# EAGLE board TinyBot_Panel-Panel (EAGLE 9.2.2), part 1 of 4
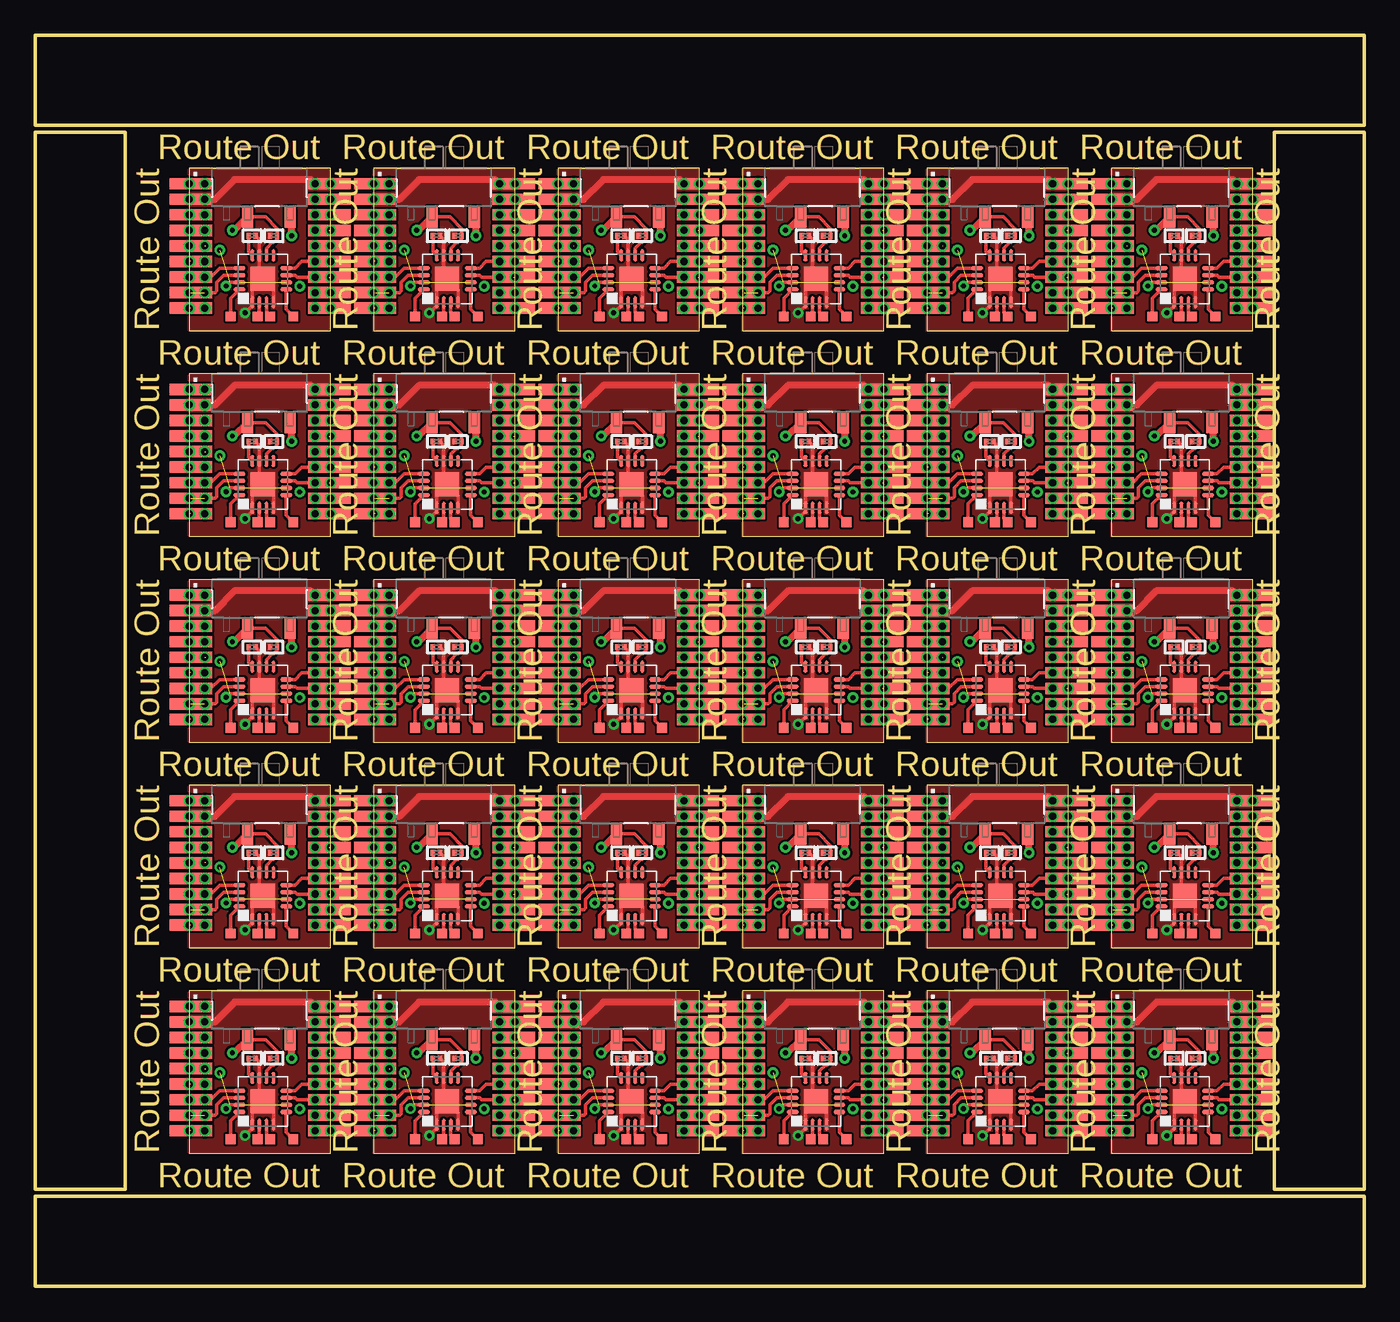
[diagram p0: board, top side]
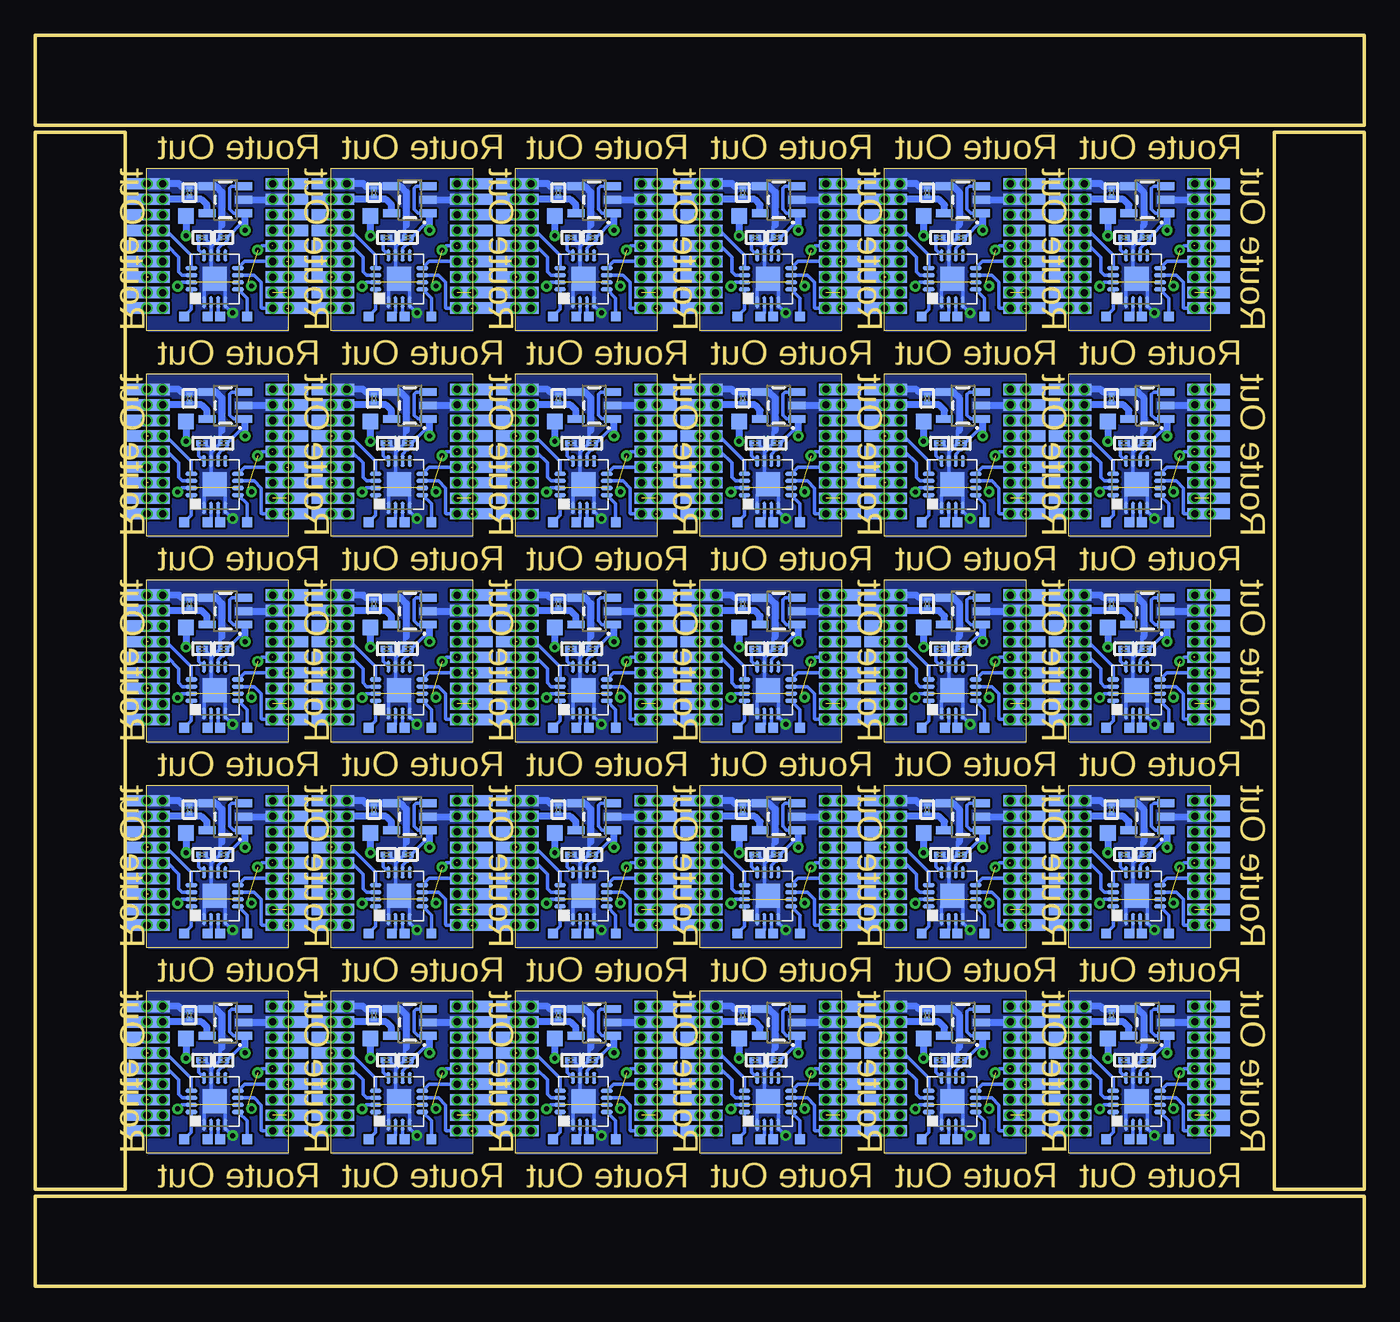
[diagram p1: board, bottom side, seen from below]

Size 94.04 x 88.49 mm. Coordinates in mm from the lower left corner, seen from the top.
Outline: 10.9,9.4 20.9,9.4 20.9,20.9 10.9,20.9 10.9,9.4
Outline: 23.95,9.4 33.95,9.4 33.95,20.9 23.95,20.9 23.95,9.4
Outline: 36.99,9.4 46.99,9.4 46.99,20.9 36.99,20.9 36.99,9.4
Outline: 50.04,9.4 60.04,9.4 60.04,20.9 50.04,20.9 50.04,9.4
Outline: 63.09,9.4 73.09,9.4 73.09,20.9 63.09,20.9 63.09,9.4
Outline: 76.14,9.4 86.14,9.4 86.14,20.9 76.14,20.9 76.14,9.4
Outline: 10.9,23.95 20.9,23.95 20.9,35.45 10.9,35.45 10.9,23.95
Outline: 23.95,23.95 33.95,23.95 33.95,35.45 23.95,35.45 23.95,23.95
Outline: 36.99,23.95 46.99,23.95 46.99,35.45 36.99,35.45 36.99,23.95
Outline: 50.04,23.95 60.04,23.95 60.04,35.45 50.04,35.45 50.04,23.95
Outline: 63.09,23.95 73.09,23.95 73.09,35.45 63.09,35.45 63.09,23.95
Outline: 76.14,23.95 86.14,23.95 86.14,35.45 76.14,35.45 76.14,23.95
Outline: 10.9,38.49 20.9,38.49 20.9,49.99 10.9,49.99 10.9,38.49
Outline: 23.95,38.49 33.95,38.49 33.95,49.99 23.95,49.99 23.95,38.49
Outline: 36.99,38.49 46.99,38.49 46.99,49.99 36.99,49.99 36.99,38.49
Outline: 50.04,38.49 60.04,38.49 60.04,49.99 50.04,49.99 50.04,38.49
Outline: 63.09,38.49 73.09,38.49 73.09,49.99 63.09,49.99 63.09,38.49
Outline: 76.14,38.49 86.14,38.49 86.14,49.99 76.14,49.99 76.14,38.49
Outline: 10.9,53.04 20.9,53.04 20.9,64.54 10.9,64.54 10.9,53.04
Outline: 23.95,53.04 33.95,53.04 33.95,64.54 23.95,64.54 23.95,53.04
Outline: 36.99,53.04 46.99,53.04 46.99,64.54 36.99,64.54 36.99,53.04
Outline: 50.04,53.04 60.04,53.04 60.04,64.54 50.04,64.54 50.04,53.04
Outline: 63.09,53.04 73.09,53.04 73.09,64.54 63.09,64.54 63.09,53.04
Outline: 76.14,53.04 86.14,53.04 86.14,64.54 76.14,64.54 76.14,53.04
Outline: 10.9,67.59 20.9,67.59 20.9,79.09 10.9,79.09 10.9,67.59
Outline: 23.95,67.59 33.95,67.59 33.95,79.09 23.95,79.09 23.95,67.59
Outline: 36.99,67.59 46.99,67.59 46.99,79.09 36.99,79.09 36.99,67.59
Outline: 50.04,67.59 60.04,67.59 60.04,79.09 50.04,79.09 50.04,67.59
Outline: 63.09,67.59 73.09,67.59 73.09,79.09 63.09,79.09 63.09,67.59
Outline: 76.14,67.59 86.14,67.59 86.14,79.09 76.14,79.09 76.14,67.59
Outline: 0,6.35 94.04,6.35 94.04,0 0,0 0,6.35
Outline: 87.69,81.63 94.04,81.63 94.04,6.86 87.69,6.86 87.69,81.63
Outline: 0,88.49 94.04,88.49 94.04,82.14 0,82.14 0,88.49
Outline: 0,81.63 6.35,81.63 6.35,6.86 0,6.86 0,81.63
Copper layers (1*16): Top 0.035mm / dielectric 1.5mm / Bottom 0.035mm
Design rules "default *": minimum track width 6mil, minimum drill 0.35mm, track to track 6mil, track to pad 6mil, pad to pad 6mil, via to via 6mil, smd to smd 6mil, copper to edge 0mil, drill to drill 6mil, minimum pad ring 0mil, minimum via ring 8mil, stop-mask expansion 4mil, vias tented up to drill 0mil, thermal gap 10mil

## Footprints (pad centres in the part's own frame; a part is rotated, then mirrored left to right if it is on the bottom)
C0201 = smd 0.3 x 0.4: 1 -0.254,0; 2 0.254,0
TP11SQ = smd 1.1 x 1.1: TP 0,0
TP07SQ = smd 0.7 x 0.7: TP 0,0
ESP01F = smd 3 x 0.8: 1 0.1,1.1; 2 0.1,2.2; 3 0.1,3.3; 4 0.1,4.4; 5 0.1,5.5; 6 0.1,6.6; 7 0.1,7.7; 8 0.1,8.8; 9 0.1,9.9; 10 9.9,1.1; 11 9.9,2.2; 12 9.9,3.3; 13 9.9,4.4; 14 9.9,5.5; 15 9.9,6.6; 16 9.9,7.7; 17 9.9,8.8; 18 9.9,9.9 | smd 3 x 0.8 bottom: 19 9.9,1.1; 20 9.9,2.2; 21 9.9,3.3; 22 9.9,4.4; 23 9.9,5.5; 24 9.9,6.6; 25 9.9,7.7; 26 9.9,8.8; 27 9.9,9.9; 28 0.1,1.1; 29 0.1,2.2; 30 0.1,3.3; 31 0.1,4.4; 32 0.1,5.5; 33 0.1,6.6; 34 0.1,7.7; 35 0.1,8.8; 36 0.1,9.9 | drill 0.5 pad 0.8: 37 10,1.1; 38 10,2.2; 39 10,3.3; 40 10,4.4; 41 10,5.5; 42 10,6.6; 43 10,7.7; 44 10,8.8; 45 10,9.9; 46 0,1.1; 47 0,2.2; 48 0,3.3; 49 0,4.4; 50 0,5.5; 51 0,6.6; 52 0,7.7; 53 0,8.8; 54 0,9.9; 55 1.1,1.1; 56 1.1,2.2; 57 1.1,3.3; 58 1.1,4.4; 59 1.1,5.5; 60 1.1,6.6; 61 1.1,7.7; 62 1.1,8.8; 63 1.1,9.9; 64 8.9,1.1; 65 8.9,2.2; 66 8.9,3.3; 67 8.9,4.4; 68 8.9,5.5; 69 8.9,6.6; 70 8.9,7.7; 71 8.9,8.8; 72 8.9,9.9
SOT23-5 = smd 0.55 x 1.2: 1 -0.95,-1.3; 2 0,-1.3; 3 0.95,-1.3; 4 0.95,1.3; 5 -0.95,1.3
MSK-12C02_NOCLIP = smd 0.8 x 1.5: COM 0.823,2.1; L2 -2.177,2.1
QFN16 = smd 0.85 x 0.3: 1 -1.655,0.75; 2 -1.655,0.25; 3 -1.655,-0.25; 4 -1.655,-0.75; 9 1.655,-0.75; 10 1.655,-0.25; 11 1.655,0.25; 12 1.655,0.75 | smd 0.3 x 0.85: 5 -0.75,-1.655; 6 -0.25,-1.655; 7 0.25,-1.655; 8 0.75,-1.655; 13 0.75,1.655; 14 0.25,1.655; 15 -0.25,1.655; 16 -0.75,1.655 | smd 1.7 x 1.7: T_PAD 0,0

## Placement (x,y rotation side)
C1  [C0201]  16.87,16.12 180 top
C2  [C0201]  15.47,15.99 180 bottom
C3  [C0201]  16.99,15.99 0 bottom
C4  [C0201]  15.34,16.12 0 top
C5  [C0201]  17.88,19.17 90 bottom
C6  [C0201]  29.92,16.12 180 top
C7  [C0201]  28.39,16.12 0 top
C8  [C0201]  28.52,15.99 180 bottom
C9  [C0201]  30.04,15.99 0 bottom
C10  [C0201]  30.93,19.17 90 bottom
C11  [C0201]  42.96,16.12 180 top
C12  [C0201]  41.44,16.12 0 top
C13  [C0201]  41.57,15.99 180 bottom
C14  [C0201]  43.09,15.99 0 bottom
C15  [C0201]  43.98,19.17 90 bottom
C16  [C0201]  56.01,16.12 180 top
C17  [C0201]  54.49,16.12 0 top
C18  [C0201]  54.61,15.99 180 bottom
C19  [C0201]  56.14,15.99 0 bottom
C20  [C0201]  57.03,19.17 90 bottom
C21  [C0201]  69.06,16.12 180 top
C22  [C0201]  67.53,16.12 0 top
C23  [C0201]  67.66,15.99 180 bottom
C24  [C0201]  69.19,15.99 0 bottom
C25  [C0201]  70.07,19.17 90 bottom
C26  [C0201]  82.11,16.12 180 top
C27  [C0201]  80.58,16.12 0 top
C28  [C0201]  80.71,15.99 180 bottom
C29  [C0201]  82.23,15.99 0 bottom
C30  [C0201]  83.12,19.17 90 bottom
C31  [C0201]  16.87,30.67 180 top
C32  [C0201]  15.34,30.67 0 top
C33  [C0201]  15.47,30.54 180 bottom
C34  [C0201]  16.99,30.54 0 bottom
C35  [C0201]  17.88,33.72 90 bottom
C36  [C0201]  29.92,30.67 180 top
C37  [C0201]  28.39,30.67 0 top
C38  [C0201]  28.52,30.54 180 bottom
C39  [C0201]  30.04,30.54 0 bottom
C40  [C0201]  30.93,33.72 90 bottom
C41  [C0201]  42.96,30.67 180 top
C42  [C0201]  41.44,30.67 0 top
C43  [C0201]  41.57,30.54 180 bottom
C44  [C0201]  43.09,30.54 0 bottom
C45  [C0201]  43.98,33.72 90 bottom
C46  [C0201]  56.01,30.67 180 top
C47  [C0201]  54.49,30.67 0 top
C48  [C0201]  54.61,30.54 180 bottom
C49  [C0201]  56.14,30.54 0 bottom
C50  [C0201]  57.03,33.72 90 bottom
C51  [C0201]  69.06,30.67 180 top
C52  [C0201]  67.53,30.67 0 top
C53  [C0201]  67.66,30.54 180 bottom
C54  [C0201]  69.19,30.54 0 bottom
C55  [C0201]  70.07,33.72 90 bottom
C56  [C0201]  82.11,30.67 180 top
C57  [C0201]  80.58,30.67 0 top
C58  [C0201]  80.71,30.54 180 bottom
C59  [C0201]  82.23,30.54 0 bottom
C60  [C0201]  83.12,33.72 90 bottom
C61  [C0201]  16.87,45.22 180 top
C62  [C0201]  15.34,45.22 0 top
C63  [C0201]  15.47,45.09 180 bottom
C64  [C0201]  16.99,45.09 0 bottom
C65  [C0201]  17.88,48.27 90 bottom
C66  [C0201]  29.92,45.22 180 top
C67  [C0201]  28.39,45.22 0 top
C68  [C0201]  28.52,45.09 180 bottom
C69  [C0201]  30.04,45.09 0 bottom
C70  [C0201]  30.93,48.27 90 bottom
C71  [C0201]  42.96,45.22 180 top
C72  [C0201]  41.44,45.22 0 top
C73  [C0201]  41.57,45.09 180 bottom
C74  [C0201]  43.09,45.09 0 bottom
C75  [C0201]  43.98,48.27 90 bottom
C76  [C0201]  56.01,45.22 180 top
C77  [C0201]  54.49,45.22 0 top
C78  [C0201]  54.61,45.09 180 bottom
C79  [C0201]  56.14,45.09 0 bottom
C80  [C0201]  57.03,48.27 90 bottom
C81  [C0201]  69.06,45.22 180 top
C82  [C0201]  67.53,45.22 0 top
C83  [C0201]  67.66,45.09 180 bottom
C84  [C0201]  69.19,45.09 0 bottom
C85  [C0201]  70.07,48.27 90 bottom
C86  [C0201]  82.11,45.22 180 top
C87  [C0201]  80.58,45.22 0 top
C88  [C0201]  80.71,45.09 180 bottom
C89  [C0201]  82.23,45.09 0 bottom
C90  [C0201]  83.12,48.27 90 bottom
C91  [C0201]  16.87,59.77 180 top
C92  [C0201]  15.34,59.77 0 top
C93  [C0201]  15.47,59.64 180 bottom
C94  [C0201]  16.99,59.64 0 bottom
C95  [C0201]  17.88,62.81 90 bottom
C96  [C0201]  29.92,59.77 180 top
C97  [C0201]  28.39,59.77 0 top
C98  [C0201]  28.52,59.64 180 bottom
C99  [C0201]  30.04,59.64 0 bottom
C100  [C0201]  30.93,62.81 90 bottom
C101  [C0201]  42.96,59.77 180 top
C102  [C0201]  41.44,59.77 0 top
C103  [C0201]  41.57,59.64 180 bottom
C104  [C0201]  43.09,59.64 0 bottom
C105  [C0201]  43.98,62.81 90 bottom
C106  [C0201]  56.01,59.77 180 top
C107  [C0201]  54.49,59.77 0 top
C108  [C0201]  54.61,59.64 180 bottom
C109  [C0201]  56.14,59.64 0 bottom
C110  [C0201]  57.03,62.81 90 bottom
C111  [C0201]  69.06,59.77 180 top
C112  [C0201]  67.53,59.77 0 top
C113  [C0201]  67.66,59.64 180 bottom
C114  [C0201]  69.19,59.64 0 bottom
C115  [C0201]  70.07,62.81 90 bottom
C116  [C0201]  82.11,59.77 180 top
C117  [C0201]  80.58,59.77 0 top
C118  [C0201]  80.71,59.64 180 bottom
C119  [C0201]  82.23,59.64 0 bottom
C120  [C0201]  83.12,62.81 90 bottom
C121  [C0201]  16.87,74.31 180 top
C122  [C0201]  15.34,74.31 0 top
C123  [C0201]  15.47,74.19 180 bottom
C124  [C0201]  16.99,74.19 0 bottom
C125  [C0201]  17.88,77.36 90 bottom
C126  [C0201]  29.92,74.31 180 top
C127  [C0201]  28.39,74.31 0 top
C128  [C0201]  28.52,74.19 180 bottom
C129  [C0201]  30.04,74.19 0 bottom
C130  [C0201]  30.93,77.36 90 bottom
C131  [C0201]  42.96,74.31 180 top
C132  [C0201]  41.44,74.31 0 top
C133  [C0201]  41.57,74.19 180 bottom
C134  [C0201]  43.09,74.19 0 bottom
C135  [C0201]  43.98,77.36 90 bottom
C136  [C0201]  56.01,74.31 180 top
C137  [C0201]  54.49,74.31 0 top
C138  [C0201]  54.61,74.19 180 bottom
C139  [C0201]  56.14,74.19 0 bottom
C140  [C0201]  57.03,77.36 90 bottom
C141  [C0201]  69.06,74.31 180 top
C142  [C0201]  67.53,74.31 0 top
C143  [C0201]  67.66,74.19 180 bottom
C144  [C0201]  69.19,74.19 0 bottom
C145  [C0201]  70.07,77.36 90 bottom
C146  [C0201]  82.11,74.31 180 top
C147  [C0201]  80.58,74.31 0 top
C148  [C0201]  80.71,74.19 180 bottom
C149  [C0201]  82.23,74.19 0 bottom
C150  [C0201]  83.12,77.36 90 bottom
LIPO_IN  TPTP11SQ  [TP11SQ]  18.14,17.52 0 bottom
LIPO_IN1  TPTP11SQ  [TP11SQ]  31.19,17.52 0 bottom
LIPO_IN2  TPTP11SQ  [TP11SQ]  44.23,17.52 0 bottom
LIPO_IN3  TPTP11SQ  [TP11SQ]  57.28,17.52 0 bottom
LIPO_IN4  TPTP11SQ  [TP11SQ]  70.33,17.52 0 bottom
LIPO_IN5  TPTP11SQ  [TP11SQ]  83.38,17.52 0 bottom
LIPO_IN6  TPTP11SQ  [TP11SQ]  18.14,32.07 0 bottom
LIPO_IN7  TPTP11SQ  [TP11SQ]  31.19,32.07 0 bottom
LIPO_IN8  TPTP11SQ  [TP11SQ]  44.23,32.07 0 bottom
LIPO_IN9  TPTP11SQ  [TP11SQ]  57.28,32.07 0 bottom
LIPO_IN10  TPTP11SQ  [TP11SQ]  70.33,32.07 0 bottom
LIPO_IN11  TPTP11SQ  [TP11SQ]  83.38,32.07 0 bottom
LIPO_IN12  TPTP11SQ  [TP11SQ]  18.14,46.61 0 bottom
LIPO_IN13  TPTP11SQ  [TP11SQ]  31.19,46.61 0 bottom
LIPO_IN14  TPTP11SQ  [TP11SQ]  44.23,46.61 0 bottom
LIPO_IN15  TPTP11SQ  [TP11SQ]  57.28,46.61 0 bottom
LIPO_IN16  TPTP11SQ  [TP11SQ]  70.33,46.61 0 bottom
LIPO_IN17  TPTP11SQ  [TP11SQ]  83.38,46.61 0 bottom
LIPO_IN18  TPTP11SQ  [TP11SQ]  18.14,61.16 0 bottom
LIPO_IN19  TPTP11SQ  [TP11SQ]  31.19,61.16 0 bottom
LIPO_IN20  TPTP11SQ  [TP11SQ]  44.23,61.16 0 bottom
LIPO_IN21  TPTP11SQ  [TP11SQ]  57.28,61.16 0 bottom
LIPO_IN22  TPTP11SQ  [TP11SQ]  70.33,61.16 0 bottom
LIPO_IN23  TPTP11SQ  [TP11SQ]  83.38,61.16 0 bottom
LIPO_IN24  TPTP11SQ  [TP11SQ]  18.14,75.71 0 bottom
LIPO_IN25  TPTP11SQ  [TP11SQ]  31.19,75.71 0 bottom
LIPO_IN26  TPTP11SQ  [TP11SQ]  44.23,75.71 0 bottom
LIPO_IN27  TPTP11SQ  [TP11SQ]  57.28,75.71 0 bottom
LIPO_IN28  TPTP11SQ  [TP11SQ]  70.33,75.71 0 bottom
LIPO_IN29  TPTP11SQ  [TP11SQ]  83.38,75.71 0 bottom
TP1  TPTP07SQ  [TP07SQ]  13.82,10.41 0 top
TP2  TPTP07SQ  [TP07SQ]  15.72,10.41 0 top
TP3  TPTP07SQ  [TP07SQ]  18.26,10.41 0 top
TP4  TPTP07SQ  [TP07SQ]  16.61,10.41 0 top
TP5  TPTP07SQ  [TP07SQ]  18.26,10.41 0 bottom
TP6  TPTP07SQ  [TP07SQ]  16.61,10.41 0 bottom
TP7  TPTP07SQ  [TP07SQ]  13.82,10.41 0 bottom
TP8  TPTP07SQ  [TP07SQ]  15.72,10.41 0 bottom
TP9  TPTP07SQ  [TP07SQ]  28.77,10.41 0 top
TP10  TPTP07SQ  [TP07SQ]  26.87,10.41 0 top
TP11  TPTP07SQ  [TP07SQ]  31.31,10.41 0 top
TP12  TPTP07SQ  [TP07SQ]  29.66,10.41 0 top
TP13  TPTP07SQ  [TP07SQ]  31.31,10.41 0 bottom
TP14  TPTP07SQ  [TP07SQ]  29.66,10.41 0 bottom
TP15  TPTP07SQ  [TP07SQ]  26.87,10.41 0 bottom
TP16  TPTP07SQ  [TP07SQ]  28.77,10.41 0 bottom
TP17  TPTP07SQ  [TP07SQ]  41.82,10.41 0 top
TP18  TPTP07SQ  [TP07SQ]  39.92,10.41 0 top
TP19  TPTP07SQ  [TP07SQ]  44.36,10.41 0 top
TP20  TPTP07SQ  [TP07SQ]  42.71,10.41 0 top
TP21  TPTP07SQ  [TP07SQ]  44.36,10.41 0 bottom
TP22  TPTP07SQ  [TP07SQ]  42.71,10.41 0 bottom
TP23  TPTP07SQ  [TP07SQ]  39.92,10.41 0 bottom
TP24  TPTP07SQ  [TP07SQ]  41.82,10.41 0 bottom
TP25  TPTP07SQ  [TP07SQ]  54.87,10.41 0 top
TP26  TPTP07SQ  [TP07SQ]  52.96,10.41 0 top
TP27  TPTP07SQ  [TP07SQ]  57.41,10.41 0 top
TP28  TPTP07SQ  [TP07SQ]  55.76,10.41 0 top
TP29  TPTP07SQ  [TP07SQ]  57.41,10.41 0 bottom
TP30  TPTP07SQ  [TP07SQ]  55.76,10.41 0 bottom
TP31  TPTP07SQ  [TP07SQ]  52.96,10.41 0 bottom
TP32  TPTP07SQ  [TP07SQ]  54.87,10.41 0 bottom
TP33  TPTP07SQ  [TP07SQ]  67.92,10.41 0 top
TP34  TPTP07SQ  [TP07SQ]  66.01,10.41 0 top
TP35  TPTP07SQ  [TP07SQ]  70.46,10.41 0 top
TP36  TPTP07SQ  [TP07SQ]  68.8,10.41 0 top
TP37  TPTP07SQ  [TP07SQ]  70.46,10.41 0 bottom
TP38  TPTP07SQ  [TP07SQ]  68.8,10.41 0 bottom
TP39  TPTP07SQ  [TP07SQ]  66.01,10.41 0 bottom
TP40  TPTP07SQ  [TP07SQ]  67.92,10.41 0 bottom
TP41  TPTP07SQ  [TP07SQ]  80.96,10.41 0 top
TP42  TPTP07SQ  [TP07SQ]  79.06,10.41 0 top
TP43  TPTP07SQ  [TP07SQ]  83.5,10.41 0 top
TP44  TPTP07SQ  [TP07SQ]  81.85,10.41 0 top
TP45  TPTP07SQ  [TP07SQ]  83.5,10.41 0 bottom
TP46  TPTP07SQ  [TP07SQ]  81.85,10.41 0 bottom
TP47  TPTP07SQ  [TP07SQ]  79.06,10.41 0 bottom
TP48  TPTP07SQ  [TP07SQ]  80.96,10.41 0 bottom
TP49  TPTP07SQ  [TP07SQ]  15.72,24.95 0 top
TP50  TPTP07SQ  [TP07SQ]  13.82,24.95 0 top
TP51  TPTP07SQ  [TP07SQ]  18.26,24.95 0 top
TP52  TPTP07SQ  [TP07SQ]  16.61,24.95 0 top
TP53  TPTP07SQ  [TP07SQ]  18.26,24.95 0 bottom
TP54  TPTP07SQ  [TP07SQ]  16.61,24.95 0 bottom
TP55  TPTP07SQ  [TP07SQ]  13.82,24.95 0 bottom
TP56  TPTP07SQ  [TP07SQ]  15.72,24.95 0 bottom
TP57  TPTP07SQ  [TP07SQ]  28.77,24.95 0 top
TP58  TPTP07SQ  [TP07SQ]  26.87,24.95 0 top
TP59  TPTP07SQ  [TP07SQ]  31.31,24.95 0 top
TP60  TPTP07SQ  [TP07SQ]  29.66,24.95 0 top
TP61  TPTP07SQ  [TP07SQ]  31.31,24.95 0 bottom
TP62  TPTP07SQ  [TP07SQ]  29.66,24.95 0 bottom
TP63  TPTP07SQ  [TP07SQ]  26.87,24.95 0 bottom
TP64  TPTP07SQ  [TP07SQ]  28.77,24.95 0 bottom
TP65  TPTP07SQ  [TP07SQ]  41.82,24.95 0 top
TP66  TPTP07SQ  [TP07SQ]  39.92,24.95 0 top
TP67  TPTP07SQ  [TP07SQ]  44.36,24.95 0 top
TP68  TPTP07SQ  [TP07SQ]  42.71,24.95 0 top
TP69  TPTP07SQ  [TP07SQ]  44.36,24.95 0 bottom
TP70  TPTP07SQ  [TP07SQ]  42.71,24.95 0 bottom
TP71  TPTP07SQ  [TP07SQ]  39.92,24.95 0 bottom
TP72  TPTP07SQ  [TP07SQ]  41.82,24.95 0 bottom
TP73  TPTP07SQ  [TP07SQ]  54.87,24.95 0 top
TP74  TPTP07SQ  [TP07SQ]  52.96,24.95 0 top
TP75  TPTP07SQ  [TP07SQ]  57.41,24.95 0 top
TP76  TPTP07SQ  [TP07SQ]  55.76,24.95 0 top
TP77  TPTP07SQ  [TP07SQ]  57.41,24.95 0 bottom
TP78  TPTP07SQ  [TP07SQ]  55.76,24.95 0 bottom
TP79  TPTP07SQ  [TP07SQ]  52.96,24.95 0 bottom
TP80  TPTP07SQ  [TP07SQ]  54.87,24.95 0 bottom
TP81  TPTP07SQ  [TP07SQ]  67.92,24.95 0 top
TP82  TPTP07SQ  [TP07SQ]  66.01,24.95 0 top
TP83  TPTP07SQ  [TP07SQ]  70.46,24.95 0 top
TP84  TPTP07SQ  [TP07SQ]  68.8,24.95 0 top
TP85  TPTP07SQ  [TP07SQ]  70.46,24.95 0 bottom
TP86  TPTP07SQ  [TP07SQ]  68.8,24.95 0 bottom
TP87  TPTP07SQ  [TP07SQ]  66.01,24.95 0 bottom
TP88  TPTP07SQ  [TP07SQ]  67.92,24.95 0 bottom
TP89  TPTP07SQ  [TP07SQ]  80.96,24.95 0 top
TP90  TPTP07SQ  [TP07SQ]  79.06,24.95 0 top
TP91  TPTP07SQ  [TP07SQ]  83.5,24.95 0 top
TP92  TPTP07SQ  [TP07SQ]  81.85,24.95 0 top
TP93  TPTP07SQ  [TP07SQ]  83.5,24.95 0 bottom
TP94  TPTP07SQ  [TP07SQ]  81.85,24.95 0 bottom
TP95  TPTP07SQ  [TP07SQ]  79.06,24.95 0 bottom
TP96  TPTP07SQ  [TP07SQ]  80.96,24.95 0 bottom
TP97  TPTP07SQ  [TP07SQ]  15.72,39.5 0 top
TP98  TPTP07SQ  [TP07SQ]  13.82,39.5 0 top
TP99  TPTP07SQ  [TP07SQ]  18.26,39.5 0 top
TP100  TPTP07SQ  [TP07SQ]  16.61,39.5 0 top
TP101  TPTP07SQ  [TP07SQ]  18.26,39.5 0 bottom
TP102  TPTP07SQ  [TP07SQ]  16.61,39.5 0 bottom
TP103  TPTP07SQ  [TP07SQ]  13.82,39.5 0 bottom
TP104  TPTP07SQ  [TP07SQ]  15.72,39.5 0 bottom
TP105  TPTP07SQ  [TP07SQ]  28.77,39.5 0 top
TP106  TPTP07SQ  [TP07SQ]  26.87,39.5 0 top
TP107  TPTP07SQ  [TP07SQ]  31.31,39.5 0 top
TP108  TPTP07SQ  [TP07SQ]  29.66,39.5 0 top
TP109  TPTP07SQ  [TP07SQ]  31.31,39.5 0 bottom
TP110  TPTP07SQ  [TP07SQ]  29.66,39.5 0 bottom
TP111  TPTP07SQ  [TP07SQ]  26.87,39.5 0 bottom
TP112  TPTP07SQ  [TP07SQ]  28.77,39.5 0 bottom
TP113  TPTP07SQ  [TP07SQ]  41.82,39.5 0 top
TP114  TPTP07SQ  [TP07SQ]  39.92,39.5 0 top
TP115  TPTP07SQ  [TP07SQ]  44.36,39.5 0 top
TP116  TPTP07SQ  [TP07SQ]  42.71,39.5 0 top
TP117  TPTP07SQ  [TP07SQ]  44.36,39.5 0 bottom
TP118  TPTP07SQ  [TP07SQ]  42.71,39.5 0 bottom
TP119  TPTP07SQ  [TP07SQ]  39.92,39.5 0 bottom
TP120  TPTP07SQ  [TP07SQ]  41.82,39.5 0 bottom
TP121  TPTP07SQ  [TP07SQ]  54.87,39.5 0 top
TP122  TPTP07SQ  [TP07SQ]  52.96,39.5 0 top
TP123  TPTP07SQ  [TP07SQ]  57.41,39.5 0 top
TP124  TPTP07SQ  [TP07SQ]  55.76,39.5 0 top
TP125  TPTP07SQ  [TP07SQ]  57.41,39.5 0 bottom
TP126  TPTP07SQ  [TP07SQ]  55.76,39.5 0 bottom
TP127  TPTP07SQ  [TP07SQ]  52.96,39.5 0 bottom
TP128  TPTP07SQ  [TP07SQ]  54.87,39.5 0 bottom
TP129  TPTP07SQ  [TP07SQ]  67.92,39.5 0 top
TP130  TPTP07SQ  [TP07SQ]  66.01,39.5 0 top
TP131  TPTP07SQ  [TP07SQ]  70.46,39.5 0 top
TP132  TPTP07SQ  [TP07SQ]  68.8,39.5 0 top
TP133  TPTP07SQ  [TP07SQ]  70.46,39.5 0 bottom
TP134  TPTP07SQ  [TP07SQ]  68.8,39.5 0 bottom
TP135  TPTP07SQ  [TP07SQ]  66.01,39.5 0 bottom
TP136  TPTP07SQ  [TP07SQ]  67.92,39.5 0 bottom
TP137  TPTP07SQ  [TP07SQ]  80.96,39.5 0 top
TP138  TPTP07SQ  [TP07SQ]  79.06,39.5 0 top
TP139  TPTP07SQ  [TP07SQ]  83.5,39.5 0 top
TP140  TPTP07SQ  [TP07SQ]  81.85,39.5 0 top
TP141  TPTP07SQ  [TP07SQ]  83.5,39.5 0 bottom
TP142  TPTP07SQ  [TP07SQ]  81.85,39.5 0 bottom
TP143  TPTP07SQ  [TP07SQ]  79.06,39.5 0 bottom
TP144  TPTP07SQ  [TP07SQ]  80.96,39.5 0 bottom
TP145  TPTP07SQ  [TP07SQ]  15.72,54.05 0 top
TP146  TPTP07SQ  [TP07SQ]  13.82,54.05 0 top
TP147  TPTP07SQ  [TP07SQ]  18.26,54.05 0 top
TP148  TPTP07SQ  [TP07SQ]  16.61,54.05 0 top
TP149  TPTP07SQ  [TP07SQ]  18.26,54.05 0 bottom
TP150  TPTP07SQ  [TP07SQ]  16.61,54.05 0 bottom
TP151  TPTP07SQ  [TP07SQ]  13.82,54.05 0 bottom
TP152  TPTP07SQ  [TP07SQ]  15.72,54.05 0 bottom
TP153  TPTP07SQ  [TP07SQ]  28.77,54.05 0 top
TP154  TPTP07SQ  [TP07SQ]  26.87,54.05 0 top
TP155  TPTP07SQ  [TP07SQ]  31.31,54.05 0 top
TP156  TPTP07SQ  [TP07SQ]  29.66,54.05 0 top
TP157  TPTP07SQ  [TP07SQ]  31.31,54.05 0 bottom
TP158  TPTP07SQ  [TP07SQ]  29.66,54.05 0 bottom
TP159  TPTP07SQ  [TP07SQ]  26.87,54.05 0 bottom
TP160  TPTP07SQ  [TP07SQ]  28.77,54.05 0 bottom
TP161  TPTP07SQ  [TP07SQ]  41.82,54.05 0 top
TP162  TPTP07SQ  [TP07SQ]  39.92,54.05 0 top
TP163  TPTP07SQ  [TP07SQ]  44.36,54.05 0 top
TP164  TPTP07SQ  [TP07SQ]  42.71,54.05 0 top
TP165  TPTP07SQ  [TP07SQ]  44.36,54.05 0 bottom
TP166  TPTP07SQ  [TP07SQ]  42.71,54.05 0 bottom
TP167  TPTP07SQ  [TP07SQ]  39.92,54.05 0 bottom
TP168  TPTP07SQ  [TP07SQ]  41.82,54.05 0 bottom
TP169  TPTP07SQ  [TP07SQ]  54.87,54.05 0 top
TP170  TPTP07SQ  [TP07SQ]  52.96,54.05 0 top
TP171  TPTP07SQ  [TP07SQ]  57.41,54.05 0 top
TP172  TPTP07SQ  [TP07SQ]  55.76,54.05 0 top
TP173  TPTP07SQ  [TP07SQ]  57.41,54.05 0 bottom
TP174  TPTP07SQ  [TP07SQ]  55.76,54.05 0 bottom
TP175  TPTP07SQ  [TP07SQ]  52.96,54.05 0 bottom
TP176  TPTP07SQ  [TP07SQ]  54.87,54.05 0 bottom
TP177  TPTP07SQ  [TP07SQ]  67.92,54.05 0 top
TP178  TPTP07SQ  [TP07SQ]  66.01,54.05 0 top
TP179  TPTP07SQ  [TP07SQ]  70.46,54.05 0 top
TP180  TPTP07SQ  [TP07SQ]  68.8,54.05 0 top
TP181  TPTP07SQ  [TP07SQ]  70.46,54.05 0 bottom
TP182  TPTP07SQ  [TP07SQ]  68.8,54.05 0 bottom
TP183  TPTP07SQ  [TP07SQ]  66.01,54.05 0 bottom
TP184  TPTP07SQ  [TP07SQ]  67.92,54.05 0 bottom
TP185  TPTP07SQ  [TP07SQ]  80.96,54.05 0 top
TP186  TPTP07SQ  [TP07SQ]  79.06,54.05 0 top
TP187  TPTP07SQ  [TP07SQ]  83.5,54.05 0 top
TP188  TPTP07SQ  [TP07SQ]  81.85,54.05 0 top
TP189  TPTP07SQ  [TP07SQ]  83.5,54.05 0 bottom
TP190  TPTP07SQ  [TP07SQ]  81.85,54.05 0 bottom
TP191  TPTP07SQ  [TP07SQ]  79.06,54.05 0 bottom
TP192  TPTP07SQ  [TP07SQ]  80.96,54.05 0 bottom
TP193  TPTP07SQ  [TP07SQ]  15.72,68.6 0 top
TP194  TPTP07SQ  [TP07SQ]  13.82,68.6 0 top
TP195  TPTP07SQ  [TP07SQ]  18.26,68.6 0 top
TP196  TPTP07SQ  [TP07SQ]  16.61,68.6 0 top
TP197  TPTP07SQ  [TP07SQ]  18.26,68.6 0 bottom
TP198  TPTP07SQ  [TP07SQ]  16.61,68.6 0 bottom
TP199  TPTP07SQ  [TP07SQ]  13.82,68.6 0 bottom
TP200  TPTP07SQ  [TP07SQ]  15.72,68.6 0 bottom
TP201  TPTP07SQ  [TP07SQ]  28.77,68.6 0 top
TP202  TPTP07SQ  [TP07SQ]  26.87,68.6 0 top
TP203  TPTP07SQ  [TP07SQ]  31.31,68.6 0 top
TP204  TPTP07SQ  [TP07SQ]  29.66,68.6 0 top
TP205  TPTP07SQ  [TP07SQ]  31.31,68.6 0 bottom
TP206  TPTP07SQ  [TP07SQ]  29.66,68.6 0 bottom
TP207  TPTP07SQ  [TP07SQ]  26.87,68.6 0 bottom
TP208  TPTP07SQ  [TP07SQ]  28.77,68.6 0 bottom
TP209  TPTP07SQ  [TP07SQ]  41.82,68.6 0 top
TP210  TPTP07SQ  [TP07SQ]  39.92,68.6 0 top
TP211  TPTP07SQ  [TP07SQ]  44.36,68.6 0 top
TP212  TPTP07SQ  [TP07SQ]  42.71,68.6 0 top
TP213  TPTP07SQ  [TP07SQ]  44.36,68.6 0 bottom
TP214  TPTP07SQ  [TP07SQ]  42.71,68.6 0 bottom
TP215  TPTP07SQ  [TP07SQ]  39.92,68.6 0 bottom
TP216  TPTP07SQ  [TP07SQ]  41.82,68.6 0 bottom
TP217  TPTP07SQ  [TP07SQ]  54.87,68.6 0 top
TP218  TPTP07SQ  [TP07SQ]  52.96,68.6 0 top
TP219  TPTP07SQ  [TP07SQ]  57.41,68.6 0 top
TP220  TPTP07SQ  [TP07SQ]  55.76,68.6 0 top
TP221  TPTP07SQ  [TP07SQ]  57.41,68.6 0 bottom
TP222  TPTP07SQ  [TP07SQ]  55.76,68.6 0 bottom
TP223  TPTP07SQ  [TP07SQ]  52.96,68.6 0 bottom
TP224  TPTP07SQ  [TP07SQ]  54.87,68.6 0 bottom
TP225  TPTP07SQ  [TP07SQ]  67.92,68.6 0 top
TP226  TPTP07SQ  [TP07SQ]  66.01,68.6 0 top
TP227  TPTP07SQ  [TP07SQ]  70.46,68.6 0 top
TP228  TPTP07SQ  [TP07SQ]  68.8,68.6 0 top
TP229  TPTP07SQ  [TP07SQ]  70.46,68.6 0 bottom
TP230  TPTP07SQ  [TP07SQ]  68.8,68.6 0 bottom
TP231  TPTP07SQ  [TP07SQ]  66.01,68.6 0 bottom
TP232  TPTP07SQ  [TP07SQ]  67.92,68.6 0 bottom
TP233  TPTP07SQ  [TP07SQ]  80.96,68.6 0 top
TP234  TPTP07SQ  [TP07SQ]  79.06,68.6 0 top
TP235  TPTP07SQ  [TP07SQ]  83.5,68.6 0 top
TP236  TPTP07SQ  [TP07SQ]  81.85,68.6 0 top
TP237  TPTP07SQ  [TP07SQ]  83.5,68.6 0 bottom
TP238  TPTP07SQ  [TP07SQ]  81.85,68.6 0 bottom
TP239  TPTP07SQ  [TP07SQ]  79.06,68.6 0 bottom
TP240  TPTP07SQ  [TP07SQ]  80.96,68.6 0 bottom
U$1  ESP01F  [ESP01F]  10.9,9.9 0 top
U$2  ESP01F  [ESP01F]  23.95,9.9 0 top
U$3  TLV755P  [SOT23-5]  28.39,18.66 90 bottom
U$4  MSK-12C02_SMD_SPDT_SWITCH_NOCLIP  [MSK-12C02_NOCLIP]  15.85,19.55 180 top
U$5  TLV755P  [SOT23-5]  15.34,18.66 90 bottom
U$6  DRV8833C  [QFN16]  29.15,13.07 90 top
U$7  DRV8833C  [QFN16]  29.15,13.07 90 bottom
U$8  MSK-12C02_SMD_SPDT_SWITCH_NOCLIP  [MSK-12C02_NOCLIP]  28.9,19.55 180 top
U$9  ESP01F  [ESP01F]  36.99,9.9 0 top
U$10  TLV755P  [SOT23-5]  41.44,18.66 90 bottom
U$11  DRV8833C  [QFN16]  16.1,13.07 90 top
U$12  DRV8833C  [QFN16]  42.2,13.07 90 top
U$13  DRV8833C  [QFN16]  42.2,13.07 90 bottom
U$14  MSK-12C02_SMD_SPDT_SWITCH_NOCLIP  [MSK-12C02_NOCLIP]  41.95,19.55 180 top
U$15  ESP01F  [ESP01F]  50.04,9.9 0 top
U$16  DRV8833C  [QFN16]  16.1,13.07 90 bottom
U$17  TLV755P  [SOT23-5]  54.49,18.66 90 bottom
U$18  DRV8833C  [QFN16]  55.25,13.07 90 top
U$19  DRV8833C  [QFN16]  55.25,13.07 90 bottom
U$20  MSK-12C02_SMD_SPDT_SWITCH_NOCLIP  [MSK-12C02_NOCLIP]  54.99,19.55 180 top
U$21  ESP01F  [ESP01F]  63.09,9.9 0 top
U$22  TLV755P  [SOT23-5]  67.53,18.66 90 bottom
U$23  DRV8833C  [QFN16]  68.3,13.07 90 top
U$24  DRV8833C  [QFN16]  68.3,13.07 90 bottom
U$25  MSK-12C02_SMD_SPDT_SWITCH_NOCLIP  [MSK-12C02_NOCLIP]  68.04,19.55 180 top
U$26  ESP01F  [ESP01F]  76.14,9.9 0 top
U$27  TLV755P  [SOT23-5]  80.58,18.66 90 bottom
U$28  DRV8833C  [QFN16]  81.34,13.07 90 top
U$29  DRV8833C  [QFN16]  81.34,13.07 90 bottom
U$30  MSK-12C02_SMD_SPDT_SWITCH_NOCLIP  [MSK-12C02_NOCLIP]  81.09,19.55 180 top
U$31  ESP01F  [ESP01F]  10.9,24.45 0 top
U$32  TLV755P  [SOT23-5]  15.34,33.21 90 bottom
U$33  DRV8833C  [QFN16]  16.1,27.62 90 top
U$34  DRV8833C  [QFN16]  16.1,27.62 90 bottom
U$35  MSK-12C02_SMD_SPDT_SWITCH_NOCLIP  [MSK-12C02_NOCLIP]  15.85,34.1 180 top
U$36  ESP01F  [ESP01F]  23.95,24.45 0 top
U$37  TLV755P  [SOT23-5]  28.39,33.21 90 bottom
U$38  DRV8833C  [QFN16]  29.15,27.62 90 top
U$39  DRV8833C  [QFN16]  29.15,27.62 90 bottom
U$40  MSK-12C02_SMD_SPDT_SWITCH_NOCLIP  [MSK-12C02_NOCLIP]  28.9,34.1 180 top
U$41  ESP01F  [ESP01F]  36.99,24.45 0 top
U$42  TLV755P  [SOT23-5]  41.44,33.21 90 bottom
U$43  DRV8833C  [QFN16]  42.2,27.62 90 top
U$44  DRV8833C  [QFN16]  42.2,27.62 90 bottom
U$45  MSK-12C02_SMD_SPDT_SWITCH_NOCLIP  [MSK-12C02_NOCLIP]  41.95,34.1 180 top
U$46  ESP01F  [ESP01F]  50.04,24.45 0 top
U$47  TLV755P  [SOT23-5]  54.49,33.21 90 bottom
U$48  DRV8833C  [QFN16]  55.25,27.62 90 top
U$49  DRV8833C  [QFN16]  55.25,27.62 90 bottom
U$50  MSK-12C02_SMD_SPDT_SWITCH_NOCLIP  [MSK-12C02_NOCLIP]  54.99,34.1 180 top
U$51  ESP01F  [ESP01F]  63.09,24.45 0 top
U$52  TLV755P  [SOT23-5]  67.53,33.21 90 bottom
U$53  DRV8833C  [QFN16]  68.3,27.62 90 top
U$54  DRV8833C  [QFN16]  68.3,27.62 90 bottom
U$55  MSK-12C02_SMD_SPDT_SWITCH_NOCLIP  [MSK-12C02_NOCLIP]  68.04,34.1 180 top
U$56  ESP01F  [ESP01F]  76.14,24.45 0 top
U$57  TLV755P  [SOT23-5]  80.58,33.21 90 bottom
U$58  DRV8833C  [QFN16]  81.34,27.62 90 top
U$59  DRV8833C  [QFN16]  81.34,27.62 90 bottom
U$60  MSK-12C02_SMD_SPDT_SWITCH_NOCLIP  [MSK-12C02_NOCLIP]  81.09,34.1 180 top
U$61  ESP01F  [ESP01F]  10.9,38.99 0 top
U$62  TLV755P  [SOT23-5]  15.34,47.76 90 bottom
U$63  DRV8833C  [QFN16]  16.1,42.17 90 top
U$64  DRV8833C  [QFN16]  16.1,42.17 90 bottom
U$65  MSK-12C02_SMD_SPDT_SWITCH_NOCLIP  [MSK-12C02_NOCLIP]  15.85,48.65 180 top
U$66  ESP01F  [ESP01F]  23.95,38.99 0 top
U$67  TLV755P  [SOT23-5]  28.39,47.76 90 bottom
U$68  DRV8833C  [QFN16]  29.15,42.17 90 top
U$69  DRV8833C  [QFN16]  29.15,42.17 90 bottom
U$70  MSK-12C02_SMD_SPDT_SWITCH_NOCLIP  [MSK-12C02_NOCLIP]  28.9,48.65 180 top
U$71  ESP01F  [ESP01F]  36.99,38.99 0 top
U$72  TLV755P  [SOT23-5]  41.44,47.76 90 bottom
U$73  DRV8833C  [QFN16]  42.2,42.17 90 top
U$74  DRV8833C  [QFN16]  42.2,42.17 90 bottom
U$75  MSK-12C02_SMD_SPDT_SWITCH_NOCLIP  [MSK-12C02_NOCLIP]  41.95,48.65 180 top
U$76  ESP01F  [ESP01F]  50.04,38.99 0 top
U$77  TLV755P  [SOT23-5]  54.49,47.76 90 bottom
U$78  DRV8833C  [QFN16]  55.25,42.17 90 top
U$79  DRV8833C  [QFN16]  55.25,42.17 90 bottom
U$80  MSK-12C02_SMD_SPDT_SWITCH_NOCLIP  [MSK-12C02_NOCLIP]  54.99,48.65 180 top
U$81  ESP01F  [ESP01F]  63.09,38.99 0 top
U$82  TLV755P  [SOT23-5]  67.53,47.76 90 bottom
U$83  DRV8833C  [QFN16]  68.3,42.17 90 top
U$84  DRV8833C  [QFN16]  68.3,42.17 90 bottom
U$85  MSK-12C02_SMD_SPDT_SWITCH_NOCLIP  [MSK-12C02_NOCLIP]  68.04,48.65 180 top
U$86  ESP01F  [ESP01F]  76.14,38.99 0 top
U$87  TLV755P  [SOT23-5]  80.58,47.76 90 bottom
U$88  DRV8833C  [QFN16]  81.34,42.17 90 top
U$89  DRV8833C  [QFN16]  81.34,42.17 90 bottom
U$90  MSK-12C02_SMD_SPDT_SWITCH_NOCLIP  [MSK-12C02_NOCLIP]  81.09,48.65 180 top
U$91  ESP01F  [ESP01F]  10.9,53.54 0 top
U$92  TLV755P  [SOT23-5]  15.34,62.31 90 bottom
U$93  DRV8833C  [QFN16]  16.1,56.72 90 top
U$94  DRV8833C  [QFN16]  16.1,56.72 90 bottom
U$95  MSK-12C02_SMD_SPDT_SWITCH_NOCLIP  [MSK-12C02_NOCLIP]  15.85,63.19 180 top
U$96  ESP01F  [ESP01F]  23.95,53.54 0 top
U$97  TLV755P  [SOT23-5]  28.39,62.31 90 bottom
U$98  DRV8833C  [QFN16]  29.15,56.72 90 top
U$99  DRV8833C  [QFN16]  29.15,56.72 90 bottom
U$100  MSK-12C02_SMD_SPDT_SWITCH_NOCLIP  [MSK-12C02_NOCLIP]  28.9,63.19 180 top
U$101  ESP01F  [ESP01F]  36.99,53.54 0 top
U$102  TLV755P  [SOT23-5]  41.44,62.31 90 bottom
U$103  DRV8833C  [QFN16]  42.2,56.72 90 top
U$104  DRV8833C  [QFN16]  42.2,56.72 90 bottom
U$105  MSK-12C02_SMD_SPDT_SWITCH_NOCLIP  [MSK-12C02_NOCLIP]  41.95,63.19 180 top
U$106  ESP01F  [ESP01F]  50.04,53.54 0 top
U$107  TLV755P  [SOT23-5]  54.49,62.31 90 bottom
U$108  DRV8833C  [QFN16]  55.25,56.72 90 top
U$109  DRV8833C  [QFN16]  55.25,56.72 90 bottom
U$110  MSK-12C02_SMD_SPDT_SWITCH_NOCLIP  [MSK-12C02_NOCLIP]  54.99,63.19 180 top
U$111  ESP01F  [ESP01F]  63.09,53.54 0 top
U$112  TLV755P  [SOT23-5]  67.53,62.31 90 bottom
U$113  DRV8833C  [QFN16]  68.3,56.72 90 top
U$114  DRV8833C  [QFN16]  68.3,56.72 90 bottom
U$115  MSK-12C02_SMD_SPDT_SWITCH_NOCLIP  [MSK-12C02_NOCLIP]  68.04,63.19 180 top
U$116  ESP01F  [ESP01F]  76.14,53.54 0 top
U$117  TLV755P  [SOT23-5]  80.58,62.31 90 bottom
U$118  DRV8833C  [QFN16]  81.34,56.72 90 top
U$119  DRV8833C  [QFN16]  81.34,56.72 90 bottom
U$120  MSK-12C02_SMD_SPDT_SWITCH_NOCLIP  [MSK-12C02_NOCLIP]  81.09,63.19 180 top
U$121  ESP01F  [ESP01F]  10.9,68.09 0 top
U$122  TLV755P  [SOT23-5]  15.34,76.85 90 bottom
U$123  DRV8833C  [QFN16]  16.1,71.27 90 top
U$124  DRV8833C  [QFN16]  16.1,71.27 90 bottom
U$125  MSK-12C02_SMD_SPDT_SWITCH_NOCLIP  [MSK-12C02_NOCLIP]  15.85,77.74 180 top
U$126  ESP01F  [ESP01F]  23.95,68.09 0 top
U$127  TLV755P  [SOT23-5]  28.39,76.85 90 bottom
U$128  DRV8833C  [QFN16]  29.15,71.27 90 top
U$129  DRV8833C  [QFN16]  29.15,71.27 90 bottom
U$130  MSK-12C02_SMD_SPDT_SWITCH_NOCLIP  [MSK-12C02_NOCLIP]  28.9,77.74 180 top
U$131  ESP01F  [ESP01F]  36.99,68.09 0 top
U$132  TLV755P  [SOT23-5]  41.44,76.85 90 bottom
U$133  DRV8833C  [QFN16]  42.2,71.27 90 top
U$134  DRV8833C  [QFN16]  42.2,71.27 90 bottom
U$135  MSK-12C02_SMD_SPDT_SWITCH_NOCLIP  [MSK-12C02_NOCLIP]  41.95,77.74 180 top
U$136  ESP01F  [ESP01F]  50.04,68.09 0 top
U$137  TLV755P  [SOT23-5]  54.49,76.85 90 bottom
U$138  DRV8833C  [QFN16]  55.25,71.27 90 top
U$139  DRV8833C  [QFN16]  55.25,71.27 90 bottom
U$140  MSK-12C02_SMD_SPDT_SWITCH_NOCLIP  [MSK-12C02_NOCLIP]  54.99,77.74 180 top
U$141  ESP01F  [ESP01F]  63.09,68.09 0 top
U$142  TLV755P  [SOT23-5]  67.53,76.85 90 bottom
U$143  DRV8833C  [QFN16]  68.3,71.27 90 top
U$144  DRV8833C  [QFN16]  68.3,71.27 90 bottom
U$145  MSK-12C02_SMD_SPDT_SWITCH_NOCLIP  [MSK-12C02_NOCLIP]  68.04,77.74 180 top
U$146  ESP01F  [ESP01F]  76.14,68.09 0 top
U$147  TLV755P  [SOT23-5]  80.58,76.85 90 bottom
U$148  DRV8833C  [QFN16]  81.34,71.27 90 top
U$149  DRV8833C  [QFN16]  81.34,71.27 90 bottom
U$150  MSK-12C02_SMD_SPDT_SWITCH_NOCLIP  [MSK-12C02_NOCLIP]  81.09,77.74 180 top

## Library data of the parts
C1-C150 = rc-master-smd
LIPO_IN LIPO_IN1-LIPO_IN29 TP1-TP240 = testpad
U$1 U$2 U$9 U$15 U$21 U$26 U$31 U$36 U$41 U$46 U$51 U$56 U$61 U$66 U$71 U$76 U$81 U$86 U$91 U$96 U$101 U$106 U$111 U$116 U$121 U$126 U$131 U$136 U$141 U$146 = esp8266modules
U$3 U$5 U$10 U$17 U$22 U$27 U$32 U$37 U$42 U$47 U$52 U$57 U$62 U$67 U$72 U$77 U$82 U$87 U$92 U$97 U$102 U$107 U$112 U$117 U$122 U$127 U$132 U$137 U$142 U$147 = SparkFun-IC-Power
U$4 U$8 U$14 U$20 U$25 U$30 U$35 U$40 U$45 U$50 U$55 U$60 U$65 U$70 U$75 U$80 U$85 U$90 U$95 U$100 U$105 U$110 U$115 U$120 U$125 U$130 U$135 U$140 U$145 U$150 = MSK-12C02 Switch SPDT
U$6 U$7 U$11-U$13 U$16 U$18 U$19 U$23 U$24 U$28 U$29 U$33 U$34 U$38 U$39 U$43 U$44 U$48 U$49 U$53 U$54 U$58 U$59 U$63 U$64 U$68 U$69 U$73 U$74 U$78 U$79 U$83 U$84 U$88 U$89 U$93 U$94 U$98 U$99 U$103 U$104 U$108 U$109 U$113 U$114 U$118 U$119 U$123 U$124 U$128 U$129 U$133 U$134 U$138 U$139 U$143 U$144 U$148 U$149 = qfn16